# EAGLE board Micro-co_ATmega (EAGLE 8.3.2)
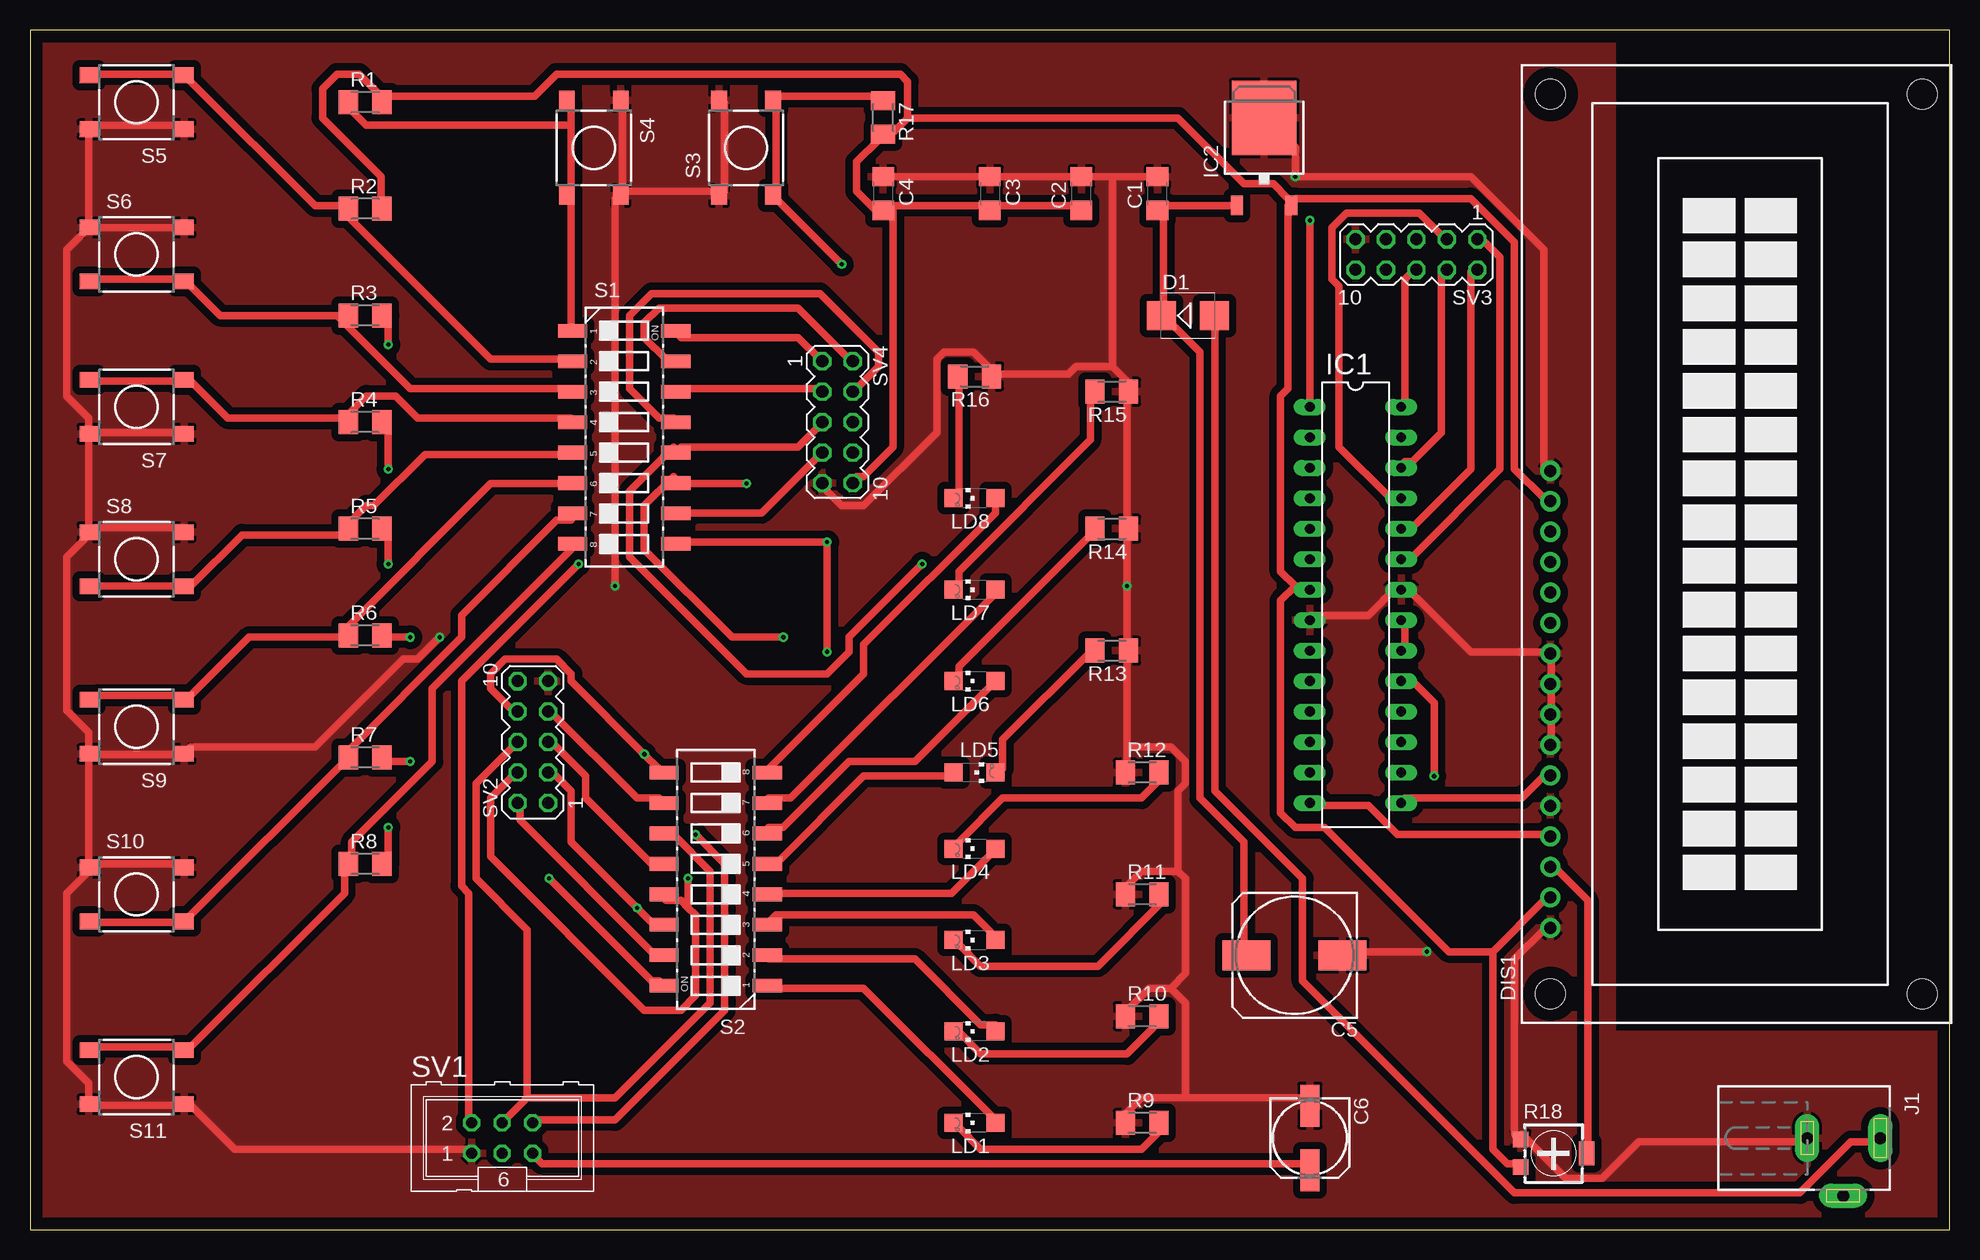
[diagram p0: board, top side]
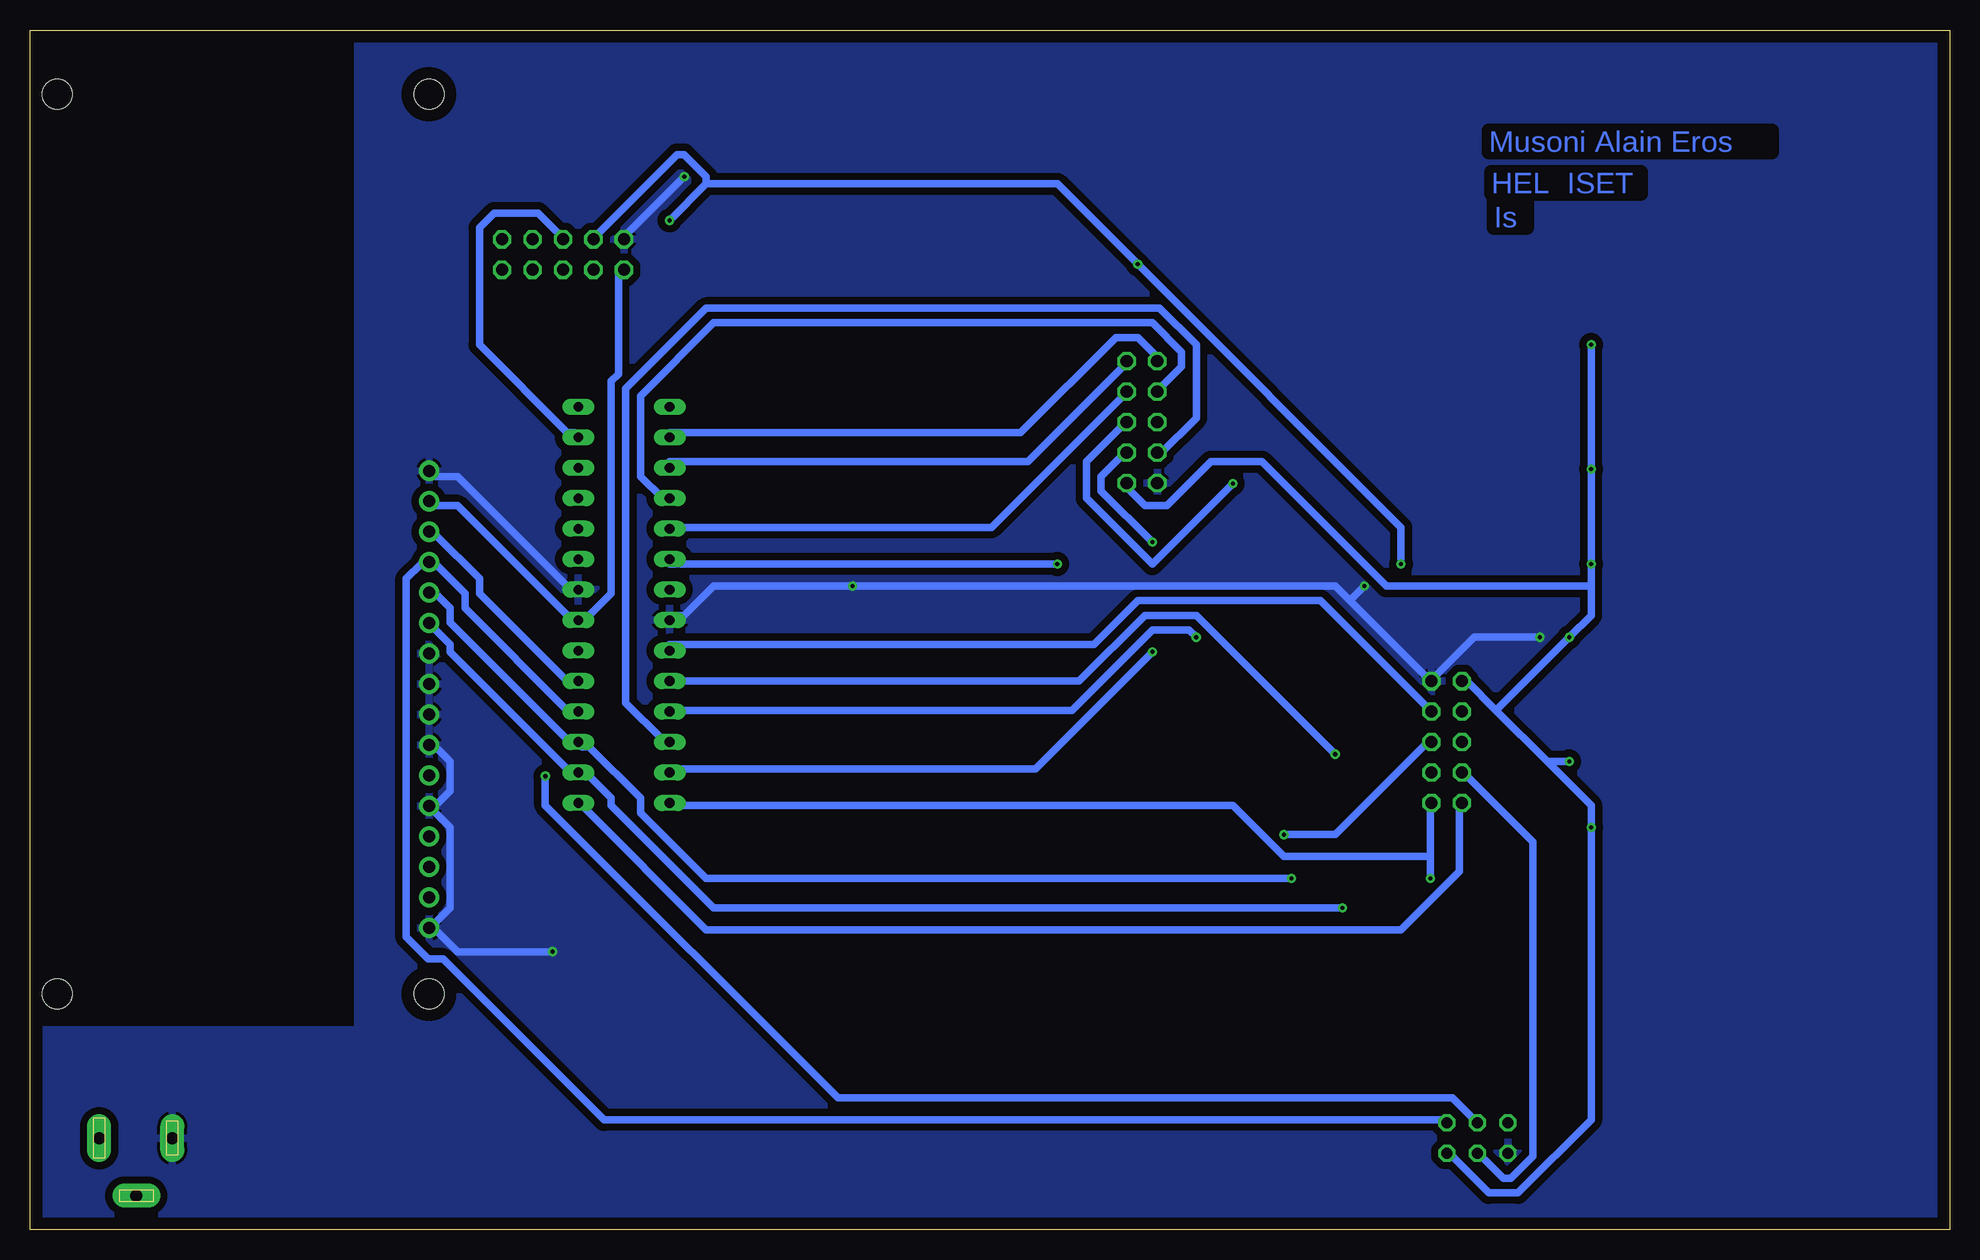
[diagram p1: board, bottom side, seen from below]

Size 160 x 100 mm. Coordinates in mm from the lower left corner, seen from the top.
Outline: 0,0 160,0 160,100 0,100 0,0
Copper layers (1*16): Top 0.035mm / dielectric 1.5mm / Bottom 0.035mm
Design rules "default *": minimum track width 24mil, minimum drill 0.35mm, track to track 24mil, track to pad 24mil, pad to pad 24mil, via to via 24mil, smd to smd 24mil, copper to edge 40mil, drill to drill 6mil, minimum pad ring 10mil, minimum via ring 8mil, stop-mask expansion 4mil, vias tented up to drill 0mil, thermal gap 10mil

## Footprints (pad centres in the part's own frame; a part is rotated, then mirrored left to right if it is on the bottom)
C1206 = smd 1.6 x 1.8: 1 -1.4,0; 2 1.4,0
153CLV-1010 = smd 4 x 2.5: + 4,0; - -4,0
153CLV-0605 = smd 3.5 x 1.6: + 2.7,0; - -2.7,0
SMB = smd 2.4 x 2.4: A 2.2,0; C -2.2,0
TUXGR_16X2_R2 = drill 1 pad 1.676: 1 -32,15.5; 2 -29.46,15.5; 3 -26.92,15.5; 4 -24.38,15.5; 5 -21.84,15.5; 6 -19.3,15.5; 7 -16.76,15.5; 8 -14.22,15.5; 9 -11.68,15.5; 10 -9.14,15.5; 11 -6.6,15.5; 12 -4.06,15.5; 13 -1.52,15.5; 14 1.02,15.5; 15 3.56,15.5; 16 6.1,15.5 | hole 2.5: -37.5,-15.5; 37.5,-15.5; -37.5,15.5; 37.5,15.5
DIL28-3 = drill 0.813 long: 1 -16.51,-3.81; 2 -13.97,-3.81; 3 -11.43,-3.81; 4 -8.89,-3.81; 5 -6.35,-3.81; 6 -3.81,-3.81; 7 -1.27,-3.81; 8 1.27,-3.81; 9 3.81,-3.81; 10 6.35,-3.81; 11 8.89,-3.81; 12 11.43,-3.81; 13 13.97,-3.81; 14 16.51,-3.81; 15 16.51,3.81; 16 13.97,3.81; 17 11.43,3.81; 18 8.89,3.81; 19 6.35,3.81; 20 3.81,3.81; 21 1.27,3.81; 22 -1.27,3.81; 23 -3.81,3.81; 24 -6.35,3.81; 25 -8.89,3.81; 26 -11.43,3.81; 27 -13.97,3.81; 28 -16.51,3.81
TO252 = smd 1 x 1.6: 1 -2.28,-4.8; 2 2.28,-4.8 | smd 5.4 x 6.2: 3 0,2.5
DCJ0202 = drill 1 pad 2 long: 1 0,3.1; 2 4.8,0; 3 0,-3
CHIPLED_1206 = smd 1.5 x 1.5: A 0,-1.75; C 0,1.75
M1206 = smd 1.6 x 2: 1 -1.4,0; 2 1.4,0
RTRIM4G/J = smd 1.3 x 1.3: 1 -1.15,-2.75; 3 1.15,-2.75 | smd 2 x 1.3: 2 0,2.75
CTS-219-08 = smd 1.13 x 2.44: 1 -8.89,-4.3; 2 -6.35,-4.3; 3 -3.81,-4.3; 4 -1.27,-4.3; 5 1.27,-4.3; 6 3.81,-4.3; 7 6.35,-4.3; 8 8.89,-4.3; 9 8.89,4.3; 10 6.35,4.3; 11 3.81,4.3; 12 1.27,4.3; 13 -1.27,4.3; 14 -3.81,4.3; 15 -6.35,4.3; 16 -8.89,4.3
DTSM-6 = smd 1.55 x 1.3: 1 -3.975,2.25; 2 3.975,2.25; 3 -3.975,-2.25; 4 3.975,-2.25
ML6 = drill 0.914 octagon: 1 -2.54,-1.27; 2 -2.54,1.27; 3 0,-1.27; 4 0,1.27; 5 2.54,-1.27; 6 2.54,1.27
MA05-2 = drill 1.016 octagon: 1 -5.08,-1.27; 2 -5.08,1.27; 3 -2.54,-1.27; 4 -2.54,1.27; 5 0,-1.27; 6 0,1.27; 7 2.54,-1.27; 8 2.54,1.27; 9 5.08,-1.27; 10 5.08,1.27

## Placement (x,y rotation side)
C1  [C1206]  93.98,86.36 90 top
C2  [C1206]  87.63,86.36 90 top
C3  [C1206]  80.01,86.36 270 top
C4  [C1206]  71.12,86.36 270 top
C5  [153CLV-1010]  105.41,22.86 180 top
C6  [153CLV-0605]  106.68,7.62 270 top
D1  ES2D  [SMB]  96.52,76.2 0 top
DIS1  TUXGR_16X2_R2  [TUXGR_16X2_R2]  142.24,57.15 90 top
IC1  MEGA8-P  [DIL28-3]  110.49,52.07 270 top
IC2  7805DT  [TO252]  102.87,90.17 0 top
J1  DCJ0202  [DCJ0202]  151.13,7.62 270 top
LD1  [CHIPLED_1206]  78.74,8.89 90 top
LD2  [CHIPLED_1206]  78.74,16.51 90 top
LD3  [CHIPLED_1206]  78.74,24.13 90 top
LD4  [CHIPLED_1206]  78.74,31.75 90 top
LD5  [CHIPLED_1206]  78.74,38.1 270 top
LD6  [CHIPLED_1206]  78.74,45.72 90 top
LD7  [CHIPLED_1206]  78.74,53.34 90 top
LD8  [CHIPLED_1206]  78.74,60.96 90 top
R1  [M1206]  27.94,93.98 0 top
R2  [M1206]  27.94,85.09 0 top
R3  [M1206]  27.94,76.2 0 top
R4  [M1206]  27.94,67.31 0 top
R5  [M1206]  27.94,58.42 0 top
R6  [M1206]  27.94,49.53 0 top
R7  [M1206]  27.94,39.37 0 top
R8  [M1206]  27.94,30.48 0 top
R9  [M1206]  92.71,8.89 0 top
R10  [M1206]  92.71,17.78 0 top
R11  [M1206]  92.71,27.94 0 top
R12  [M1206]  92.71,38.1 0 top
R13  [M1206]  90.17,48.26 180 top
R14  [M1206]  90.17,58.42 180 top
R15  [M1206]  90.17,69.85 180 top
R16  [M1206]  78.74,71.12 180 top
R17  [M1206]  71.12,92.71 270 top
R18  [RTRIM4G/J]  127,6.35 270 top
S1  219-08  [CTS-219-08]  49.53,66.04 270 top
S2  219-08  [CTS-219-08]  57.15,29.21 90 top
S3  DTSM-6  [DTSM-6]  59.69,90.17 90 top
S4  DTSM-6  [DTSM-6]  46.99,90.17 270 top
S5  DTSM-6  [DTSM-6]  8.89,93.98 180 top
S6  DTSM-6  [DTSM-6]  8.89,81.28 0 top
S7  DTSM-6  [DTSM-6]  8.89,68.58 180 top
S8  DTSM-6  [DTSM-6]  8.89,55.88 0 top
S9  DTSM-6  [DTSM-6]  8.89,41.91 180 top
S10  DTSM-6  [DTSM-6]  8.89,27.94 0 top
S11  DTSM-6  [DTSM-6]  8.89,12.7 180 top
SV1  [ML6]  39.37,7.62 0 top
SV2  [MA05-2]  41.91,40.64 90 top
SV3  [MA05-2]  115.57,81.28 180 top
SV4  [MA05-2]  67.31,67.31 270 top

## Library data of the parts
C1-C6 R1-R18 = rcl
D1 = diode
DIS1 = display-lcd; OC_FARNELL: unknown; OC_NEWARK: unknown
IC1 = atmel; OC_FARNELL: unknown; OC_NEWARK: unknown
IC2 = linear
J1 = con-jack; OC_FARNELL: unknown; OC_NEWARK: unknown
LD1-LD8 = led
S1 S2 = switch-dil; OC_FARNELL: unknown; OC_NEWARK: unknown
S3-S11 = switch-tact
SV1 = con-ml; OC_FARNELL: unknown; OC_NEWARK: unknown
SV2-SV4 = con-lstb; OC_FARNELL: unknown; OC_NEWARK: unknown

## Nets
BP0: R1.1 S1.1 S4.3 S4.4
BP1: R2.1 S1.2 S5.3 S5.4
BP2: R3.1 S1.3 S6.3 S6.4
BP3: R4.1 S1.4 S7.3 S7.4
BP4: R5.1 S1.5 S8.3 S8.4
BP5: R6.1 S1.6 S9.3 S9.4
BP6: R7.1 S1.7 S10.3 S10.4
BP7: R8.1 S1.8 S11.3 S11.4
GND: C1.2 C2.2 C3.1 C4.1 C5.- C6.- DIS1.1 DIS1.5 DIS1.7 DIS1.8 DIS1.9 DIS1.10 DIS1.16 IC1.8 IC1.22 IC2.3 J1.3 R9.1 R10.1 R11.1 R12.1 R13.1 R14.1 R15.1 R16.1 R18.1 S3.1 S3.2 S4.1 S4.2 S5.1 S5.2 S6.1 S6.2 S7.1 S7.2 S8.1 S8.2 S9.1 S9.2 S10.1 S10.2 S11.1 S11.2 SV1.1 SV2.9 SV3.9 SV4.9
LED0: LD1.A S2.1
LED1: LD2.A S2.2
LED2: LD3.A S2.3
LED3: LD4.A S2.4
LED4: LD5.A S2.5
LED5: LD6.A S2.6
LED6: LD7.A S2.7
LED7: LD8.A S2.8
N$1: DIS1.3 R18.2
N$2: D1.A J1.1
N$3: C1.1 C5.+ D1.C IC2.1
N$4: LD1.C R9.2
N$5: LD2.C R10.2
N$6: LD3.C R11.2
N$7: LD4.C R12.2
N$8: LD5.C R13.2
N$9: LD6.C R14.2
N$10: LD7.C R15.2
N$11: LD8.C R16.2
PB0: DIS1.4 IC1.14 S2.16 SV2.1
PB1: DIS1.6 IC1.15 S2.15 SV2.2
PB2: DIS1.11 IC1.16 S2.14 SV2.3
PB3: DIS1.12 IC1.17 S2.13 SV1.3 SV2.4
PB4: DIS1.13 IC1.18 S2.12 SV1.6 SV2.5
PB5: DIS1.14 IC1.19 S2.11 SV1.4 SV2.6
PB6: IC1.9 S2.10 SV2.7
PB7: IC1.10 S2.9 SV2.8
PC0: IC1.23 SV3.1
PC1: IC1.24 SV3.2
PC2: IC1.25 SV3.3
PC3: IC1.26 SV3.4
PC4: IC1.27 SV3.5
PC5: IC1.28 SV3.6
PC6: IC1.1 R17.1 S3.3 S3.4 SV1.2 SV3.7
PD0: IC1.2 S1.16 SV4.1
PD1: IC1.3 S1.15 SV4.2
PD2: IC1.4 S1.14 SV4.3
PD3: IC1.5 S1.13 SV4.4
PD4: IC1.6 S1.12 SV4.5
PD5: IC1.11 S1.11 SV4.6
PD6: IC1.12 S1.10 SV4.7
PD7: IC1.13 S1.9 SV4.8
VCC: C2.1 C3.2 C4.2 C6.+ DIS1.2 DIS1.15 IC1.7 IC1.20 IC1.21 IC2.2 R1.2 R2.2 R3.2 R4.2 R5.2 R6.2 R7.2 R8.2 R17.2 R18.3 SV1.5 SV2.10 SV3.10 SV4.10

## Tracks (layer width: path | path; a pad name or v marks a point on that pad's centre or on a via)
BP0
  Top 0.61: 45.11,92.05 45.11,93.88 S4.3 | 45.11,92.05 45.11,86.56 S4.4 45.11,85.95 45.11,74.98 S1.1 | 45.11,92.05 28.04,92.05 26.82,93.27 26.82,93.88 R1.1
BP1
  Top 0.61: S5.4 5.49,96.32 12.8,96.32 S5.3 13.41,95.71 23.77,85.34 26.21,85.34 R2.1 26.21,84.73 38.41,72.54 45.11,72.54 S1.2
BP2
  Top 0.61: S6.3 5.49,79.25 12.8,79.25 S6.4 13.41,78.64 15.85,76.2 25.6,76.2 | 25.6,76.2 R3.1 | 25.6,76.2 31.7,70.1 45.11,70.1 S1.3
BP3
  Top 0.61: S7.4 5.49,70.71 12.8,70.71 S7.3 13.41,70.71 16.46,67.67 26.21,67.67 | 26.21,67.67 28.04,69.49 30.48,69.49 32.31,67.67 45.11,67.67 S1.4 | 26.21,67.67 R4.1
BP4
  Top 0.61: S8.3 5.49,53.65 12.8,53.65 S8.4 13.41,53.65 17.68,57.91 26.21,57.91 R5.1 26.21,58.52 28.04,60.35 28.65,60.35 32.92,64.62 45.11,64.62 S1.5
BP5
  Top 0.61: S9.4 5.49,44.5 12.8,44.5 S9.3 13.41,44.5 18.29,49.38 26.21,49.38 R6.1 26.21,49.99 38.41,62.18 45.11,62.18 S1.6
BP6
  Top 0.61: S10.3 5.49,25.6 12.8,25.6 S10.4 13.41,26.21 26.21,39.01 R7.1 26.21,39.62 35.97,49.38 35.97,51.21 43.89,59.13 45.11,59.13 S1.7
BP7
  Top 0.61: S11.4 5.49,15.24 12.8,15.24 S11.3 13.41,15.24 26.21,28.04 26.21,30.48 R8.1 26.82,30.48 26.82,32.31 33.53,39.01 33.53,45.11 45.11,56.69 S1.8
GND  (via drill 0.35)
  Top 0.61: 96.32,10.97 106.07,10.97 106.68,10.36 C6.- | 96.32,10.97 92.66,10.97 91.44,9.75 91.44,9.14 R9.1 | 95.1,20.12 93.27,20.12 91.44,18.29 R10.1 | 95.1,20.12 96.32,18.9 96.32,10.97 | 95.71,29.87 92.66,29.87 91.44,28.65 91.44,28.04 R11.1 | 95.71,29.87 96.32,29.26 96.32,21.34 95.1,20.12 | 90.22,87.78 93.88,87.78 C1.2 | 90.22,87.78 87.78,87.78 C2.2 87.17,87.78 80.47,87.78 C3.1 79.86,87.78 71.32,87.78 C4.1 | 91.44,40.23 91.44,48.16 R13.1 91.44,48.77 v91.44,53.65 91.44,57.91 R14.1 91.44,58.52 91.44,69.49 R15.1 92.05,70.1 90.22,71.93 | 91.44,40.23 91.44,38.41 R12.1 | 80.47,71.32 86.56,71.32 87.17,71.93 90.22,71.93 | 80.47,71.32 78.64,73.15 76.2,73.15 75.59,72.54 75.59,66.45 69.49,60.35 67.67,60.35 66.45,61.57 66.45,62.18 SV4.9 | 80.47,71.32 R16.1 | 90.22,71.93 90.22,87.78 | 95.71,29.87 95.71,36.58 96.32,37.19 96.32,39.01 95.1,40.23 91.44,40.23 | SV1.1 36.58,6.71 17.07,6.71 13.41,10.36 S11.1 12.8,10.36 5.49,10.36 S11.2 4.88,10.97 4.88,12.19 3.05,14.02 3.05,28.04 4.88,29.87 S10.1 | S10.1 5.49,30.48 12.8,30.48 S10.2 | S9.2 5.49,39.62 12.8,39.62 S9.1 13.41,40.23 23.77,40.23 31.09,47.55 32.31,47.55 v34.14,49.38 | S10.1 4.88,30.48 4.88,39.62 S9.2 | S8.1 4.88,58.52 4.88,65.84 S7.2 | S8.2 12.8,58.52 5.49,58.52 S8.1 | S7.1 12.8,66.45 5.49,66.45 S7.2 | S6.1 5.49,83.52 12.8,83.52 S6.2 | S5.1 12.8,92.05 5.49,92.05 S5.2 4.88,91.44 4.88,84.12 S6.1 | S7.2 4.88,66.45 4.88,67.67 3.05,69.49 3.05,81.69 4.88,83.52 S6.1 | S9.2 4.88,40.23 4.88,41.45 3.05,43.28 3.05,56.08 4.88,57.91 S8.1 | DIS1.7 126.8,40.84 126.8,42.67 DIS1.8 126.8,43.28 126.8,45.11 DIS1.9 126.8,45.72 126.8,47.55 DIS1.10 126.19,48.16 120.09,48.16 114.61,53.65 IC1.22 114,53.65 111.56,51.21 106.68,51.21 IC1.8
  Top 0.61: DIS1.1 126.19,24.99 123.75,22.55 123.75,7.92 R18.1 124.36,7.92 128.02,4.27 131.06,4.27 134.11,7.32 147.52,7.32 J1.3 | v116.43,23.16 109.73,23.16 C5.- | IC2.3 103.02,92.66 105.46,90.22 v105.46,87.78 120.09,87.78 126.19,81.69 126.19,63.4 DIS1.16 | 49.38,86.56 49.38,93.88 S4.1 | S3.2 57.91,93.88 57.91,86.56 S3.1 57.3,86.56 49.38,86.56 | 49.38,86.56 S4.2 48.77,85.95 v48.77,53.65
  Bottom 0.61: DIS1.7 126.19,40.23 124.97,39.01 124.97,36.58 126.19,35.36 DIS1.5 126.19,34.75 124.97,33.53 124.97,26.82 126.19,25.6 DIS1.1 126.19,24.99 124.36,23.16 v116.43,23.16 | v105.46,87.78 110.34,82.91 SV3.9 | 49.99,52.43 51.21,53.65 v91.44,53.65 103.02,53.65 105.46,51.21 106.68,51.21 IC1.8 | 49.99,52.43 43.28,45.72 | DIS1.16 126.19,62.79 124.36,62.79 114.61,53.03 IC1.22 | 49.99,52.43 v48.77,53.65 | v34.14,49.38 39.62,49.38 43.28,45.72 | 43.28,45.72 SV2.9
  pour Top: 0.2,99.77 131.88,99.77 131.88,16.26 159.72,16.26 159.72,0.41 0.2,0.41
  pour Bottom: 0.61,99.57 132.69,99.57 132.69,16.66 159.51,16.66 159.51,0.41 0.61,0.41
LED0
  Top 0.61: LD1.A 80.47,9.14 69.49,20.12 61.57,20.12 S2.1
LED1
  Top 0.61: LD2.A 80.47,17.07 79.25,17.07 73.76,22.55 61.57,22.55 S2.2
LED2
  Top 0.61: LD3.A 80.47,24.38 78.64,26.21 62.18,26.21 61.57,25.6 S2.3
LED3
  Top 0.61: LD4.A 80.47,31.7 76.81,28.04 61.57,28.04 S2.4
LED4
  Top 0.61: S2.5 62.18,30.48 69.49,37.8 76.81,37.8 LD5.A
LED5
  Top 0.61: LD6.A 80.47,45.72 73.76,39.01 68.28,39.01 62.79,33.53 61.57,33.53 S2.6
LED6
  Top 0.61: LD7.A 80.47,53.03 63.4,35.97 61.57,35.97 S2.7
LED7
  Top 0.61: LD8.A 80.47,60.96 80.47,59.74 69.49,48.77 69.49,46.33 61.57,38.41 S2.8
N$1
  Top 0.61: R18.2 129.84,6.71 129.84,27.43 126.8,30.48 DIS1.3
N$2
  Top 0.61: D1.A 98.75,76.2 98.75,36.58 106.07,29.26 106.07,20.73 123.75,3.05 147.52,3.05 151.79,7.32 154.23,7.32 J1.1
N$3
  Top 0.61: IC2.1 100.58,85.34 94.49,85.34 C1.1 94.49,84.73 94.49,76.2 | 94.49,76.2 97.54,73.15 97.54,35.97 101.19,32.31 101.19,23.16 C5.+ | 94.49,76.2 D1.C
N$4
  Top 0.61: LD1.C 77.42,8.53 79.25,6.71 92.66,6.71 94.49,8.53 R9.2
N$5
  Top 0.61: LD2.C 77.42,16.46 79.25,14.63 91.44,14.63 94.49,17.68 R10.2
N$6
  Top 0.61: LD3.C 77.42,23.77 79.25,21.95 89,21.95 94.49,27.43 R11.2
N$7
  Top 0.61: LD4.C 77.42,32.31 81.08,35.97 92.66,35.97 94.49,37.8 R12.2
N$8
  Top 0.61: LD5.C 81.08,38.41 81.08,40.84 88.39,48.16 R13.2
N$9
  Top 0.61: LD6.C 77.42,45.72 77.42,46.94 88.39,57.91 R14.2
N$10
  Top 0.61: LD7.C 77.42,53.65 77.42,54.86 88.39,65.84 88.39,69.49 R15.2
N$11
  Top 0.61: LD8.C 77.42,60.96 77.42,70.71 R16.2
PB0  (via drill 0.35)
  Top 0.61: IC1.14 106.68,35.36 111.56,35.36 114,32.92 126.19,32.92 DIS1.4 | v43.28,29.26 51.82,20.73 52.43,20.73 S2.16
  Bottom 0.61: 43.28,31.09 43.28,35.36 SV2.1 | 43.28,31.09 v43.28,29.26 | 43.28,31.09 55.47,31.09 59.74,35.36 106.68,35.36 IC1.14
PB1
  Top 0.61: IC1.15 114.61,35.97 124.36,35.97 126.19,37.8 DIS1.6 | S2.15 52.43,23.16 51.82,23.16 40.84,34.14 40.84,35.36 SV2.2
  Bottom 0.61: IC1.15 114,35.36 103.63,24.99 45.72,24.99 40.84,29.87 40.84,35.36 SV2.2
PB2  (via drill 0.35)
  Top 0.61: S2.14 52.43,25.6 51.82,25.6 v50.6,26.82 45.11,32.31 45.11,36.58 43.28,38.41 SV2.3
  Bottom 0.61: DIS1.11 126.19,49.99 124.97,48.77 124.97,48.16 115.21,38.41 114.61,38.41 IC1.16 114,38.41 111.56,35.97 111.56,35.36 103.02,26.82 v50.6,26.82
PB3  (via drill 0.35)
  Top 0.61: 54.86,26.82 55.47,26.21 55.47,19.51 54.25,18.29 51.21,18.29 38.41,31.09 38.41,35.97 40.23,37.8 SV2.4 | 54.86,26.82 54.25,27.43 53.03,27.43 S2.13 | 54.86,26.82 v54.86,29.26
  Bottom 0.61: DIS1.12 126.19,53.03 124.97,51.82 124.97,50.6 115.21,40.84 114.61,40.84 IC1.17 114,40.23 113.39,40.23 109.12,35.97 109.12,34.75 103.63,29.26 v54.86,29.26 | SV1.3 39.01,6.1 37.19,4.27 36.58,4.27 34.75,6.1 34.75,32.31 40.23,37.8 SV2.4
PB4  (via drill 0.35)
  Top 0.61: S2.12 51.82,30.48 46.33,35.97 46.33,37.8 43.28,40.84 SV2.5 | v55.47,32.92 57.91,30.48 57.91,18.29 48.77,9.14 42.06,9.14 SV1.6
  Bottom 0.61: IC1.18 114.61,43.28 115.21,43.28 123.75,51.82 123.75,53.03 126.19,55.47 DIS1.13 126.8,55.47 127.41,55.47 128.63,54.25 128.63,24.38 126.8,22.55 125.58,22.55 112.17,9.14 42.06,9.14 SV1.6 | v55.47,32.92 51.21,32.92 43.28,40.84 SV2.5
PB5  (via drill 0.35)
  Top 0.61: 41.45,10.97 48.77,10.97 56.69,18.9 56.69,29.87 53.65,32.92 53.03,32.92 S2.11 | SV1.4 41.45,10.97 | SV2.6 37.19,37.19 37.19,29.26 41.45,24.99 41.45,10.97 | IC1.19 115.21,45.72 117.04,43.89 v117.04,37.8
  Bottom 0.61: IC1.19 115.21,45.72 122.53,53.03 122.53,54.25 126.19,57.91 DIS1.14 | v117.04,37.8 117.04,35.36 92.66,10.97 41.45,10.97 SV1.4
PB6
  Top 0.61: S2.10 52.43,35.97 50.6,35.97 43.28,43.28 SV2.7
  Bottom 0.61: SV2.7 52.43,52.43 67.67,52.43 71.32,48.77 106.68,48.77 IC1.9
PB7  (via drill 0.35)
  Top 0.61: S2.9 52.43,38.41 v51.21,39.62 45.11,45.72 45.11,46.33 43.89,47.55 39.62,47.55 38.41,46.33 38.41,45.11 40.23,43.28 SV2.8
  Bottom 0.61: IC1.10 72.54,45.72 67.06,51.21 62.79,51.21 v51.21,39.62
PC0
  Top 0.61: IC1.23 114.61,56.08 115.21,56.08 122.53,63.4 122.53,81.08 120.7,82.91 SV3.1
PC1
  Top 0.61: IC1.24 114.61,58.52 115.21,58.52 120.09,63.4 120.09,79.86 SV3.2
PC2
  Top 0.61: IC1.25 113.39,60.96 109.12,65.23 109.12,78.64 108.51,79.25 108.51,83.52 109.73,84.73 115.82,84.73 117.65,82.91 SV3.3
PC3
  Top 0.61: IC1.26 114.61,64.01 115.21,64.01 117.65,66.45 117.65,79.86 SV3.4
PC4
  Bottom 0.61: IC1.27 114.61,66.45 115.21,66.45 122.53,73.76 122.53,83.52 121.31,84.73 117.65,84.73 115.82,82.91 SV3.5
PC5
  Top 0.61: IC1.28 114.61,68.89 114.61,79.25 115.21,79.86 SV3.6
PC6  (via drill 0.35)
  Top 0.61: R17.1 70.71,94.49 62.18,94.49 S3.4 62.18,93.88 62.18,86.56 S3.3 62.18,85.95 v67.67,80.47 | v106.68,84.12 IC1.1 | v45.72,55.47 35.97,45.72 35.97,28.65 36.58,28.04 36.58,9.14 SV1.2
  Bottom 0.61: 103.63,87.17 v106.68,84.12 | 103.63,87.17 103.63,87.78 105.46,89.61 106.07,89.61 112.78,82.91 SV3.7 | v45.72,55.47 45.72,58.52 v67.67,80.47 74.37,87.17 103.63,87.17
PD0
  Top 0.61: S1.16 54.25,74.37 64.01,74.37 65.84,72.54 SV4.1
  Bottom 0.61: IC1.2 106.68,66.45 77.42,66.45 69.49,74.37 67.67,74.37 65.84,72.54 SV4.1
PD1
  Top 0.61: S1.15 53.65,72.54 53.03,72.54 51.21,74.37 51.21,75.59 52.43,76.81 64.01,76.81 68.28,72.54 SV4.2
  Bottom 0.61: IC1.3 106.68,64.01 76.81,64.01 68.89,71.93 SV4.2
PD2
  Top 0.61: S1.14 54.25,70.1 65.84,70.1 SV4.3
  Bottom 0.61: IC1.4 107.29,60.96 109.12,62.79 109.12,69.49 103.02,75.59 66.45,75.59 64.01,73.15 64.01,71.93 65.84,70.1 SV4.3
PD3
  Top 0.61: S1.13 53.65,67.67 52.43,67.67 49.99,70.1 49.99,76.2 51.82,78.03 65.84,78.03 70.71,73.15 70.71,71.93 68.89,70.1 SV4.4
  Bottom 0.61: IC1.5 106.68,58.52 79.86,58.52 68.89,69.49 SV4.4
PD4  (via drill 0.35)
  Top 0.61: SV4.5 65.84,67.06 64.01,65.23 54.25,65.23 S1.12 53.65,65.23 49.99,61.57 49.99,56.08 59.74,46.33 66.45,46.33 68.28,48.16 68.28,49.38 v74.37,55.47
  Bottom 0.61: v74.37,55.47 106.68,55.47 IC1.6
PD5  (via drill 0.35)
  Top 0.61: v59.74,62.18 54.25,62.18 S1.11 53.65,62.79 51.21,60.35 51.21,56.69 58.52,49.38 v62.79,49.38
  Bottom 0.61: v59.74,62.18 66.45,55.47 71.93,60.96 71.93,64.01 68.89,67.06 SV4.6 | v62.79,49.38 63.4,49.99 66.45,49.99 73.15,43.28 106.68,43.28 IC1.11
PD6
  Top 0.61: S1.10 54.25,59.74 60.96,59.74 65.84,64.62 SV4.7
  Bottom 0.61: IC1.12 106.68,40.84 107.29,40.84 110.34,43.89 110.34,70.1 103.63,76.81 65.84,76.81 62.79,73.76 62.79,67.67 65.84,64.62 SV4.7
PD7  (via drill 0.35)
  Top 0.61: S1.9 54.25,57.3 v66.45,57.3 v66.45,48.16
  Bottom 0.61: v66.45,57.3 70.71,61.57 70.71,62.79 68.89,64.62 SV4.8 | v66.45,48.16 76.2,38.41 106.68,38.41 IC1.13
VCC  (via drill 0.35)
  Top 0.61: v29.87,33.53 29.87,30.48 R8.2 | v31.7,39.01 29.87,39.01 R7.2 | v31.7,49.38 29.87,49.38 R6.2 | v29.87,55.47 29.87,57.91 R5.2 | v29.87,63.4 29.87,67.06 R4.2 | v29.87,73.76 29.87,76.2 R3.2 | C6.+ 106.68,5.49 42.67,5.49 42.06,6.1 SV1.5 | R2.2 29.26,85.34 29.26,87.78 24.38,92.66 24.38,95.1 25.6,96.32 27.43,96.32 29.26,94.49 R1.2 29.87,94.49 42.06,94.49 43.89,96.32 72.54,96.32 73.15,95.71 73.15,92.66 | 71.93,85.34 79.86,85.34 C3.2 80.47,85.34 87.17,85.34 C2.1 | 71.93,85.34 71.32,85.34 C4.2 | C4.2 70.71,84.73 68.89,86.56 68.89,89 70.71,90.83 R17.2 71.32,90.83 73.15,92.66 | 71.93,85.34 71.93,65.23 69.49,62.79 68.89,62.79 SV4.10 | 71.93,85.34 C4.2 | IC1.20 114.61,48.77 114.61,50.6 IC1.21 | 121.92,23.16 121.92,6.71 123.14,5.49 123.75,5.49 R18.3 | 121.92,23.16 126.19,27.43 DIS1.2 | 105.46,53.65 104.24,54.86 104.24,69.49 104.85,70.1 104.85,85.34 IC2.2 | 105.46,53.65 106.68,53.65 IC1.7 105.46,53.65 | 121.92,23.16 118.26,23.16 107.9,33.53 105.46,33.53 104.24,34.75 104.24,52.43 105.46,53.65 | DIS1.15 126.19,60.96 123.75,63.4 123.75,82.3 120.09,85.95 105.46,85.95 IC2.2 | 73.15,92.66 95.71,92.66 101.19,87.17 103.63,87.17 104.85,85.95 IC2.2
  Bottom 0.61: 37.8,43.28 40.23,45.72 SV2.10 | 37.8,43.28 33.53,39.01 | 33.53,39.01 29.87,35.36 v29.87,33.53 29.87,9.14 35.97,3.05 38.41,3.05 41.45,6.1 SV1.5 | 33.53,39.01 v31.7,39.01 | 37.8,43.28 v31.7,49.38 29.87,51.21 29.87,53.65 | 29.87,53.65 v29.87,55.47 v29.87,63.4 v29.87,73.76 | SV3.10 110.95,79.86 110.95,71.32 111.56,70.71 111.56,53.03 114,50.6 IC1.21 114.61,50.6 124.36,60.35 126.19,60.35 DIS1.15 | 29.87,53.65 46.94,53.65 57.3,64.01 61.57,64.01 65.23,60.35 67.06,60.35 68.89,62.18 SV4.10

## Text on the board
Bottom: Musoni Alain Eros | HEL ISET | Is